# EAGLE board main (EAGLE 7.6.0)

Size 100 x 80 mm. Coordinates in mm from the lower left corner, seen from the top.
Outline: 0,0 100,0 100,80 0,80 0,0
Copper layers (1*16): Top 0.035mm / dielectric 1.5mm / Bottom 0.035mm
Design rules "default": minimum track width 10mil, minimum drill 24mil, track to track 8mil, track to pad 8mil, pad to pad 8mil, via to via 8mil, smd to smd 8mil, copper to edge 40mil, drill to drill 8mil, minimum pad ring 10mil, minimum via ring 8mil, stop-mask expansion 4mil, vias tented up to drill 0mil, thermal gap 10mil

## Footprints (pad centres in the part's own frame; a part is rotated, then mirrored left to right if it is on the bottom)
2,15/1,0 = drill 1.016 pad 2.159 octagon: 1 0,0
C2.5-4 = drill 0.813 pad 1.6 octagon: 1 -1.27,0; 2 1.27,0
0204V = drill 0.813 octagon: 1 -1.27,0; 2 1.27,0
TO92-EBC-OVAL = drill 0.813 long: B 0,-1.27; C 2.54,-1.27; E -2.54,-1.27
22-23-2021 = drill 1 long: 1 -1.27,0; 2 1.27,0

## Placement (x,y rotation side)
ANTENNA  [2,15/1,0]  71.12,16.51 0 top
C1  [C2.5-4]  43.18,25.4 90 top
C2  [C2.5-4]  24.13,26.67 90 top
C3  [C2.5-4]  55.88,38.1 90 top
C4  [C2.5-4]  67.31,34.29 270 top
C5  [C2.5-4]  -35.56,13.97 0 top  (outside the outline)
C6  [C2.5-4]  -15.24,20.32 0 top  (outside the outline)
C7  [C2.5-4]  -20.32,20.32 0 top  (outside the outline)
GND  [2,15/1,0]  76.2,3.81 0 top
L1  [2,15/1,0]  49.53,19.05 0 top
L2  [2,15/1,0]  49.53,12.7 0 top
R1  [0204V]  -27.94,25.4 0 top  (outside the outline)
R2  [0204V]  22.86,44.45 0 top
R3  [0204V]  -15.24,30.48 0 top  (outside the outline)
R4  [0204V]  -20.32,30.48 0 top  (outside the outline)
R5  [0204V]  -25.4,30.48 0 top  (outside the outline)
T1  2N2222  [TO92-EBC-OVAL]  41.91,10.16 270 top
T2  2N2222  [TO92-EBC-OVAL]  68.58,11.43 270 top
V+  [2,15/1,0]  76.2,24.13 0 top
X2  22-23-2021  [22-23-2021]  11.43,8.89 270 top

## Library data of the parts
ANTENNA GND L1 L2 V+ = wirepad
C1-C7 = capacitor-wima
R1-R5 T1 T2 = adafruit
X2 = con-molex; MF: MOLEX; MPN: 22-23-2021; OC_FARNELL: 1462926; OC_NEWARK: 25C3832

## Nets
N$2: ANTENNA.1 C3.2 C4.1 C5.1 L2.1 T2.C
N$3: C3.1 R1.2 T2.E
N$4: C1.2 C2.2 R2.1 T2.B
N$5: C2.1 C6.1 GND.1 R1.1 T1.E X2.1
N$7: C1.1 R3.1 R4.2 T1.C
N$9: C7.1 R4.1 T1.B
N$10: C7.2 R5.1 X2.2
N$15: C4.2 C5.2 C6.2 L1.1 R2.2 R3.2 R5.2 V+.1

## Tracks (layer width: path | path; a pad name or v marks a point on that pad's centre or on a via)
N$2  (5 unrouted)
N$3  (2 unrouted)
N$4  (3 unrouted)
N$5  (5 unrouted)
N$7  (3 unrouted)
N$9  (2 unrouted)
N$10  (2 unrouted)
N$15  (7 unrouted)